# EAGLE board SparkFun_Gyro_Breakout-L3G4200D_Panel_v10 (EAGLE 7.4.0), part 1 of 4
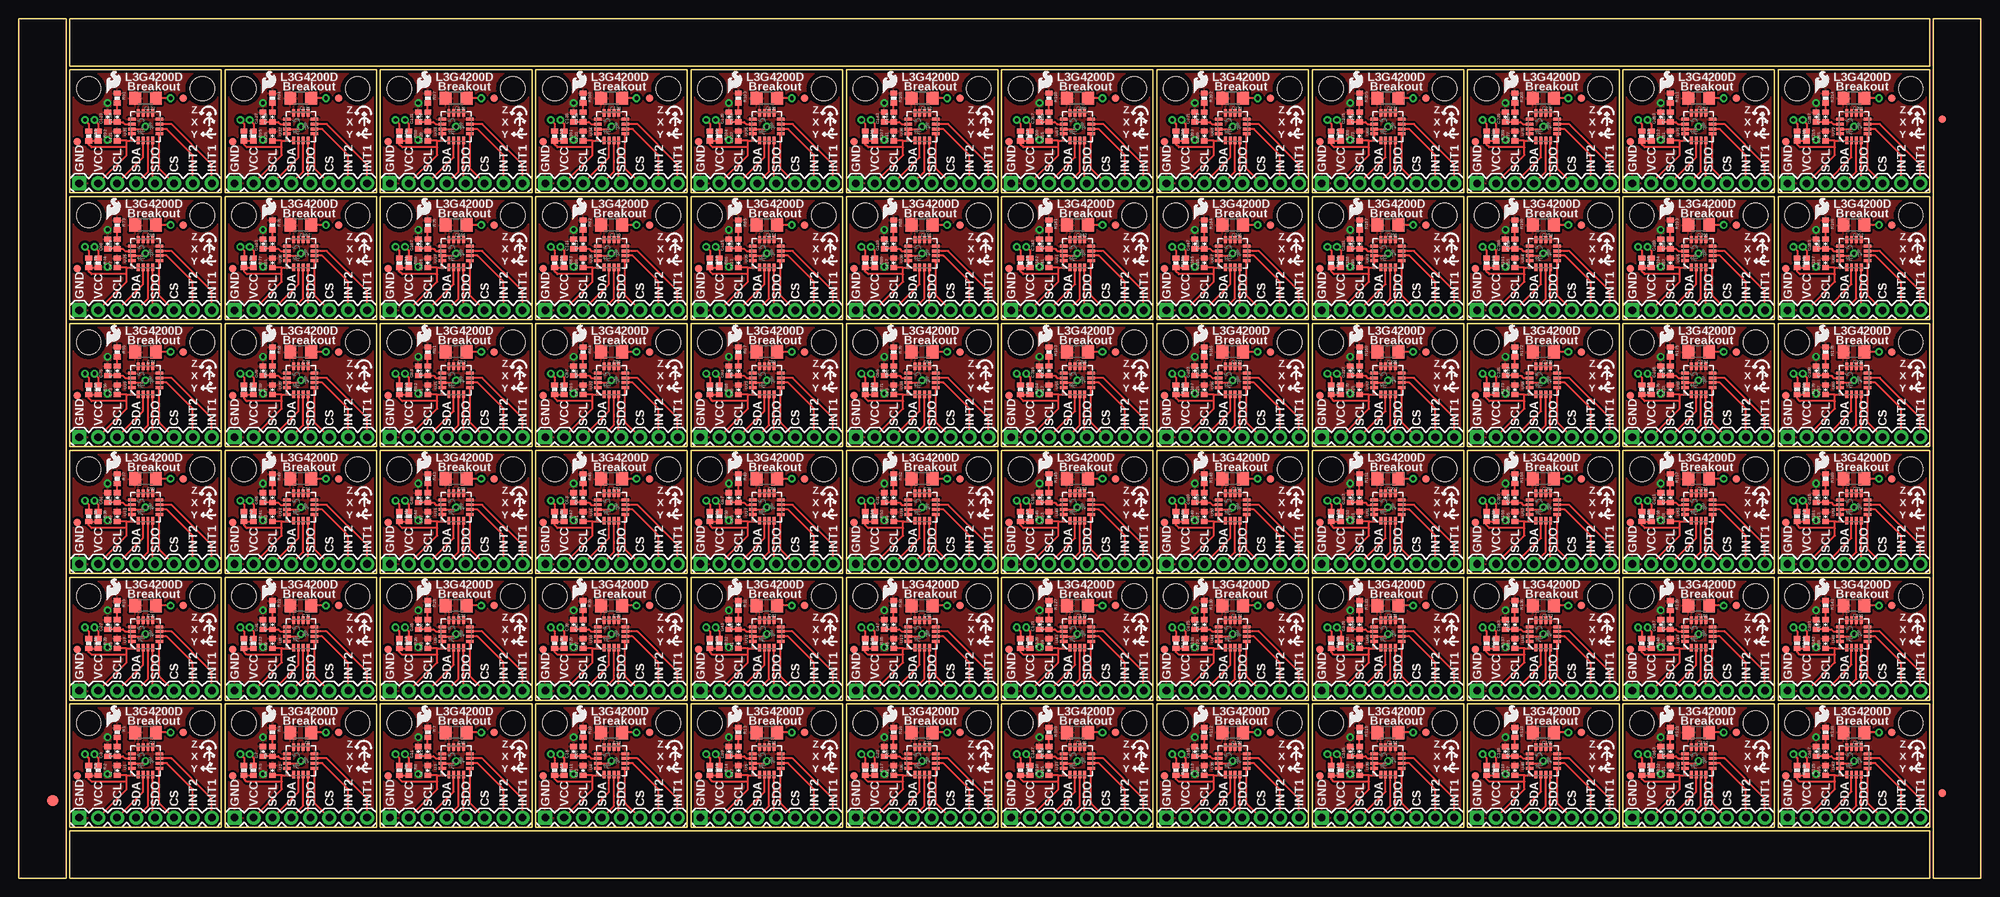
[diagram p0: board, top side]
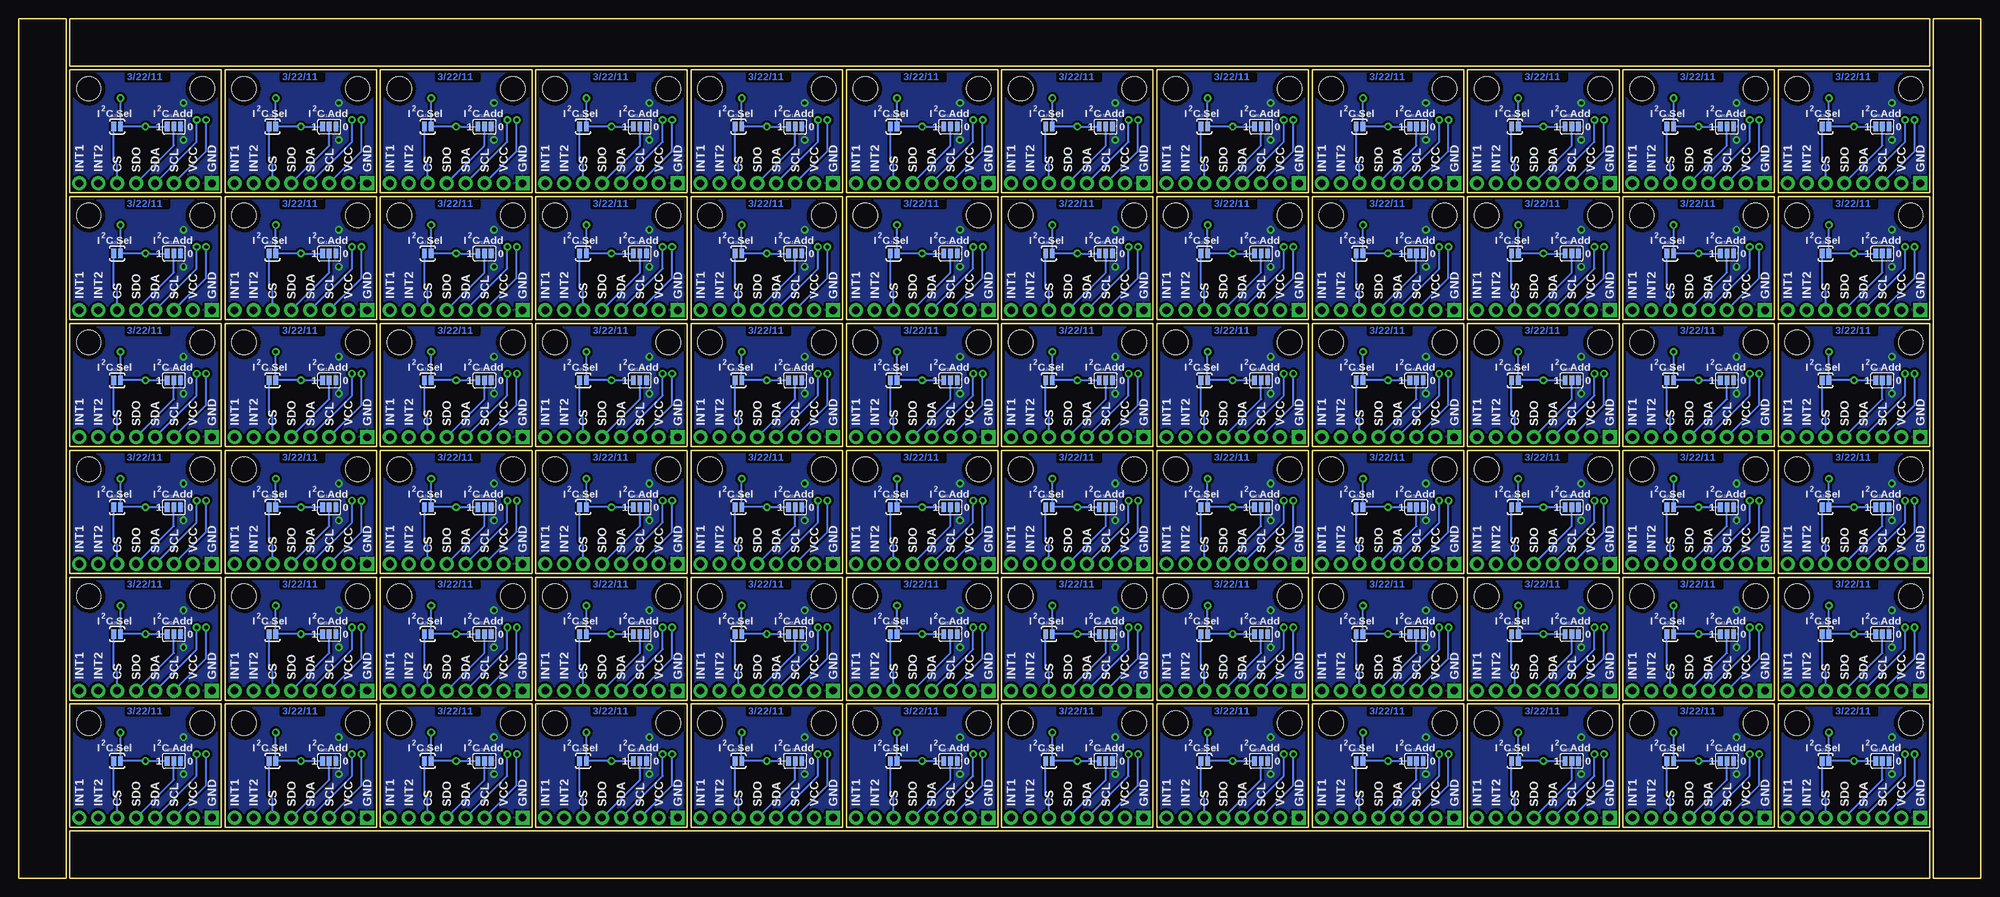
[diagram p1: board, bottom side, seen from below]

Size 263.14 x 115.32 mm. Coordinates in mm from the lower left corner, seen from the top.
Outline: 312 segments
Copper layers (1*16): Top 0.035mm / dielectric 1.5mm / Bottom 0.035mm
Design rules "SparkFun": minimum track width 8mil, minimum drill 20mil, track to track 8mil, track to pad 8mil, pad to pad 8mil, via to via 8mil, smd to smd 8mil, copper to edge 8mil, drill to drill 8mil, minimum pad ring 12mil, minimum via ring 10mil, stop-mask expansion 4mil, vias tented up to drill 20mil, thermal gap 10mil

## Footprints (pad centres in the part's own frame; a part is rotated, then mirrored left to right if it is on the bottom)
0402-CAP = smd 0.7 x 0.9: 1 -0.65,0; 2 0.65,0
1206 = smd 1.6 x 1.8: 1 -1.4,0; 2 1.4,0
FIDUCIAL-1.5X3 = smd 1.5 x 1.5: 1 0,0
FIDUCIAL-1X2 = smd 1 x 1: 1 0,0
1X08 = drill 1.016 pad 1.88 square: 1 0,0 | drill 1.016 pad 1.88: 2 2.54,0; 3 5.08,0; 4 7.62,0; 5 10.16,0; 6 12.7,0; 7 15.24,0; 8 17.78,0
STAND-OFF = hole 3.302: 0,0
0402-RES = smd 0.7 x 0.9: 1 -0.65,0; 2 0.65,0
SJ_3 = smd 0.635 x 1.27: 1 -0.889,0; 2 0,0; 3 0.889,0
SJ_2S-NO = smd 0.635 x 1.27: 1 -0.45,0; 2 0.45,0
LGA16-4X4 = smd 1 x 0.4: 1 -1.85,0.975; 2 -1.85,0.325; 3 -1.85,-0.325; 4 -1.85,-0.975; 9 1.85,-0.975; 10 1.85,-0.325; 11 1.85,0.325; 12 1.85,0.975 | smd 0.4 x 1: 5 -0.975,-1.85; 6 -0.325,-1.85; 7 0.325,-1.85; 8 0.975,-1.85; 13 0.975,1.85; 14 0.325,1.85; 15 -0.325,1.85; 16 -0.975,1.85

## Placement (x,y rotation side)
C1  0.1uF  [0402-CAP]  13.21,14.48 90 top
C2  10uF  [1206]  17.02,19.56 180 top
C3  10nF  [0402-CAP]  11.94,17.02 90 top
C4  470nF  [0402-CAP]  13.21,17.02 90 top
C5  0.1uF  [0402-CAP]  34.04,14.48 90 top
C6  10uF  [1206]  37.85,19.56 180 top
C7  10nF  [0402-CAP]  32.77,17.02 90 top
C8  470nF  [0402-CAP]  34.04,17.02 90 top
C9  0.1uF  [0402-CAP]  54.86,14.48 90 top
C10  10uF  [1206]  58.67,19.56 180 top
C11  10nF  [0402-CAP]  53.59,17.02 90 top
C12  470nF  [0402-CAP]  54.86,17.02 90 top
C13  0.1uF  [0402-CAP]  75.69,14.48 90 top
C14  10uF  [1206]  79.5,19.56 180 top
C15  10nF  [0402-CAP]  74.42,17.02 90 top
C16  470nF  [0402-CAP]  75.69,17.02 90 top
C17  0.1uF  [0402-CAP]  96.52,14.48 90 top
C18  10uF  [1206]  100.33,19.56 180 top
C19  10nF  [0402-CAP]  95.25,17.02 90 top
C20  470nF  [0402-CAP]  96.52,17.02 90 top
C21  0.1uF  [0402-CAP]  117.35,14.48 90 top
C22  10uF  [1206]  121.16,19.56 180 top
C23  10nF  [0402-CAP]  116.08,17.02 90 top
C24  470nF  [0402-CAP]  117.35,17.02 90 top
C25  0.1uF  [0402-CAP]  13.21,31.5 90 top
C26  10uF  [1206]  17.02,36.58 180 top
C27  10nF  [0402-CAP]  11.94,34.04 90 top
C28  470nF  [0402-CAP]  13.21,34.04 90 top
C29  0.1uF  [0402-CAP]  34.04,31.5 90 top
C30  10uF  [1206]  37.85,36.58 180 top
C31  10nF  [0402-CAP]  32.77,34.04 90 top
C32  470nF  [0402-CAP]  34.04,34.04 90 top
C33  0.1uF  [0402-CAP]  54.86,31.5 90 top
C34  10uF  [1206]  58.67,36.58 180 top
C35  10nF  [0402-CAP]  53.59,34.04 90 top
C36  470nF  [0402-CAP]  54.86,34.04 90 top
C37  0.1uF  [0402-CAP]  75.69,31.5 90 top
C38  10uF  [1206]  79.5,36.58 180 top
C39  10nF  [0402-CAP]  74.42,34.04 90 top
C40  470nF  [0402-CAP]  75.69,34.04 90 top
C41  0.1uF  [0402-CAP]  96.52,31.5 90 top
C42  10uF  [1206]  100.33,36.58 180 top
C43  10nF  [0402-CAP]  95.25,34.04 90 top
C44  470nF  [0402-CAP]  96.52,34.04 90 top
C45  0.1uF  [0402-CAP]  117.35,31.5 90 top
C46  10uF  [1206]  121.16,36.58 180 top
C47  10nF  [0402-CAP]  116.08,34.04 90 top
C48  470nF  [0402-CAP]  117.35,34.04 90 top
C49  0.1uF  [0402-CAP]  13.21,48.51 90 top
C50  10uF  [1206]  17.02,53.59 180 top
C51  10nF  [0402-CAP]  11.94,51.05 90 top
C52  470nF  [0402-CAP]  13.21,51.05 90 top
C53  0.1uF  [0402-CAP]  34.04,48.51 90 top
C54  10uF  [1206]  37.85,53.59 180 top
C55  10nF  [0402-CAP]  32.77,51.05 90 top
C56  470nF  [0402-CAP]  34.04,51.05 90 top
C57  0.1uF  [0402-CAP]  54.86,48.51 90 top
C58  10uF  [1206]  58.67,53.59 180 top
C59  10nF  [0402-CAP]  53.59,51.05 90 top
C60  470nF  [0402-CAP]  54.86,51.05 90 top
C61  0.1uF  [0402-CAP]  75.69,48.51 90 top
C62  10uF  [1206]  79.5,53.59 180 top
C63  10nF  [0402-CAP]  74.42,51.05 90 top
C64  470nF  [0402-CAP]  75.69,51.05 90 top
C65  0.1uF  [0402-CAP]  96.52,48.51 90 top
C66  10uF  [1206]  100.33,53.59 180 top
C67  10nF  [0402-CAP]  95.25,51.05 90 top
C68  470nF  [0402-CAP]  96.52,51.05 90 top
C69  0.1uF  [0402-CAP]  117.35,48.51 90 top
C70  10uF  [1206]  121.16,53.59 180 top
C71  10nF  [0402-CAP]  116.08,51.05 90 top
C72  470nF  [0402-CAP]  117.35,51.05 90 top
C73  0.1uF  [0402-CAP]  13.21,65.53 90 top
C74  10uF  [1206]  17.02,70.61 180 top
C75  10nF  [0402-CAP]  11.94,68.07 90 top
C76  470nF  [0402-CAP]  13.21,68.07 90 top
C77  0.1uF  [0402-CAP]  34.04,65.53 90 top
C78  10uF  [1206]  37.85,70.61 180 top
C79  10nF  [0402-CAP]  32.77,68.07 90 top
C80  470nF  [0402-CAP]  34.04,68.07 90 top
C81  0.1uF  [0402-CAP]  54.86,65.53 90 top
C82  10uF  [1206]  58.67,70.61 180 top
C83  10nF  [0402-CAP]  53.59,68.07 90 top
C84  470nF  [0402-CAP]  54.86,68.07 90 top
C85  0.1uF  [0402-CAP]  75.69,65.53 90 top
C86  10uF  [1206]  79.5,70.61 180 top
C87  10nF  [0402-CAP]  74.42,68.07 90 top
C88  470nF  [0402-CAP]  75.69,68.07 90 top
C89  0.1uF  [0402-CAP]  96.52,65.53 90 top
C90  10uF  [1206]  100.33,70.61 180 top
C91  10nF  [0402-CAP]  95.25,68.07 90 top
C92  470nF  [0402-CAP]  96.52,68.07 90 top
C93  0.1uF  [0402-CAP]  117.35,65.53 90 top
C94  10uF  [1206]  121.16,70.61 180 top
C95  10nF  [0402-CAP]  116.08,68.07 90 top
C96  470nF  [0402-CAP]  117.35,68.07 90 top
C97  0.1uF  [0402-CAP]  13.21,82.55 90 top
C98  10uF  [1206]  17.02,87.63 180 top
C99  10nF  [0402-CAP]  11.94,85.09 90 top
C100  470nF  [0402-CAP]  13.21,85.09 90 top
C101  0.1uF  [0402-CAP]  34.04,82.55 90 top
C102  10uF  [1206]  37.85,87.63 180 top
C103  10nF  [0402-CAP]  32.77,85.09 90 top
C104  470nF  [0402-CAP]  34.04,85.09 90 top
C105  0.1uF  [0402-CAP]  54.86,82.55 90 top
C106  10uF  [1206]  58.67,87.63 180 top
C107  10nF  [0402-CAP]  53.59,85.09 90 top
C108  470nF  [0402-CAP]  54.86,85.09 90 top
C109  0.1uF  [0402-CAP]  75.69,82.55 90 top
C110  10uF  [1206]  79.5,87.63 180 top
C111  10nF  [0402-CAP]  74.42,85.09 90 top
C112  470nF  [0402-CAP]  75.69,85.09 90 top
C113  0.1uF  [0402-CAP]  96.52,82.55 90 top
C114  10uF  [1206]  100.33,87.63 180 top
C115  10nF  [0402-CAP]  95.25,85.09 90 top
C116  470nF  [0402-CAP]  96.52,85.09 90 top
C117  0.1uF  [0402-CAP]  117.35,82.55 90 top
C118  10uF  [1206]  121.16,87.63 180 top
C119  10nF  [0402-CAP]  116.08,85.09 90 top
C120  470nF  [0402-CAP]  117.35,85.09 90 top
C121  0.1uF  [0402-CAP]  13.21,99.57 90 top
C122  10uF  [1206]  17.02,104.65 180 top
C123  10nF  [0402-CAP]  11.94,102.11 90 top
C124  470nF  [0402-CAP]  13.21,102.11 90 top
C125  0.1uF  [0402-CAP]  34.04,99.57 90 top
C126  10uF  [1206]  37.85,104.65 180 top
C127  10nF  [0402-CAP]  32.77,102.11 90 top
C128  470nF  [0402-CAP]  34.04,102.11 90 top
C129  0.1uF  [0402-CAP]  54.86,99.57 90 top
C130  10uF  [1206]  58.67,104.65 180 top
C131  10nF  [0402-CAP]  53.59,102.11 90 top
C132  470nF  [0402-CAP]  54.86,102.11 90 top
C133  0.1uF  [0402-CAP]  75.69,99.57 90 top
C134  10uF  [1206]  79.5,104.65 180 top
C135  10nF  [0402-CAP]  74.42,102.11 90 top
C136  470nF  [0402-CAP]  75.69,102.11 90 top
C137  0.1uF  [0402-CAP]  96.52,99.57 90 top
C138  10uF  [1206]  100.33,104.65 180 top
C139  10nF  [0402-CAP]  95.25,102.11 90 top
C140  470nF  [0402-CAP]  96.52,102.11 90 top
C141  0.1uF  [0402-CAP]  117.35,99.57 90 top
C142  10uF  [1206]  121.16,104.65 180 top
C143  10nF  [0402-CAP]  116.08,102.11 90 top
C144  470nF  [0402-CAP]  117.35,102.11 90 top
C145  0.1uF  [0402-CAP]  138.18,14.48 90 top
C146  10uF  [1206]  141.99,19.56 180 top
C147  10nF  [0402-CAP]  136.91,17.02 90 top
C148  470nF  [0402-CAP]  138.18,17.02 90 top
C149  0.1uF  [0402-CAP]  159,14.48 90 top
C150  10uF  [1206]  162.81,19.56 180 top
C151  10nF  [0402-CAP]  157.73,17.02 90 top
C152  470nF  [0402-CAP]  159,17.02 90 top
C153  0.1uF  [0402-CAP]  179.83,14.48 90 top
C154  10uF  [1206]  183.64,19.56 180 top
C155  10nF  [0402-CAP]  178.56,17.02 90 top
C156  470nF  [0402-CAP]  179.83,17.02 90 top
C157  0.1uF  [0402-CAP]  200.66,14.48 90 top
C158  10uF  [1206]  204.47,19.56 180 top
C159  10nF  [0402-CAP]  199.39,17.02 90 top
C160  470nF  [0402-CAP]  200.66,17.02 90 top
C161  0.1uF  [0402-CAP]  221.49,14.48 90 top
C162  10uF  [1206]  225.3,19.56 180 top
C163  10nF  [0402-CAP]  220.22,17.02 90 top
C164  470nF  [0402-CAP]  221.49,17.02 90 top
C165  0.1uF  [0402-CAP]  242.32,14.48 90 top
C166  10uF  [1206]  246.13,19.56 180 top
C167  10nF  [0402-CAP]  241.05,17.02 90 top
C168  470nF  [0402-CAP]  242.32,17.02 90 top
C169  0.1uF  [0402-CAP]  138.18,31.5 90 top
C170  10uF  [1206]  141.99,36.58 180 top
C171  10nF  [0402-CAP]  136.91,34.04 90 top
C172  470nF  [0402-CAP]  138.18,34.04 90 top
C173  0.1uF  [0402-CAP]  159,31.5 90 top
C174  10uF  [1206]  162.81,36.58 180 top
C175  10nF  [0402-CAP]  157.73,34.04 90 top
C176  470nF  [0402-CAP]  159,34.04 90 top
C177  0.1uF  [0402-CAP]  179.83,31.5 90 top
C178  10uF  [1206]  183.64,36.58 180 top
C179  10nF  [0402-CAP]  178.56,34.04 90 top
C180  470nF  [0402-CAP]  179.83,34.04 90 top
C181  0.1uF  [0402-CAP]  200.66,31.5 90 top
C182  10uF  [1206]  204.47,36.58 180 top
C183  10nF  [0402-CAP]  199.39,34.04 90 top
C184  470nF  [0402-CAP]  200.66,34.04 90 top
C185  0.1uF  [0402-CAP]  221.49,31.5 90 top
C186  10uF  [1206]  225.3,36.58 180 top
C187  10nF  [0402-CAP]  220.22,34.04 90 top
C188  470nF  [0402-CAP]  221.49,34.04 90 top
C189  0.1uF  [0402-CAP]  242.32,31.5 90 top
C190  10uF  [1206]  246.13,36.58 180 top
C191  10nF  [0402-CAP]  241.05,34.04 90 top
C192  470nF  [0402-CAP]  242.32,34.04 90 top
C193  0.1uF  [0402-CAP]  138.18,48.51 90 top
C194  10uF  [1206]  141.99,53.59 180 top
C195  10nF  [0402-CAP]  136.91,51.05 90 top
C196  470nF  [0402-CAP]  138.18,51.05 90 top
C197  0.1uF  [0402-CAP]  159,48.51 90 top
C198  10uF  [1206]  162.81,53.59 180 top
C199  10nF  [0402-CAP]  157.73,51.05 90 top
C200  470nF  [0402-CAP]  159,51.05 90 top
C201  0.1uF  [0402-CAP]  179.83,48.51 90 top
C202  10uF  [1206]  183.64,53.59 180 top
C203  10nF  [0402-CAP]  178.56,51.05 90 top
C204  470nF  [0402-CAP]  179.83,51.05 90 top
C205  0.1uF  [0402-CAP]  200.66,48.51 90 top
C206  10uF  [1206]  204.47,53.59 180 top
C207  10nF  [0402-CAP]  199.39,51.05 90 top
C208  470nF  [0402-CAP]  200.66,51.05 90 top
C209  0.1uF  [0402-CAP]  221.49,48.51 90 top
C210  10uF  [1206]  225.3,53.59 180 top
C211  10nF  [0402-CAP]  220.22,51.05 90 top
C212  470nF  [0402-CAP]  221.49,51.05 90 top
C213  0.1uF  [0402-CAP]  242.32,48.51 90 top
C214  10uF  [1206]  246.13,53.59 180 top
C215  10nF  [0402-CAP]  241.05,51.05 90 top
C216  470nF  [0402-CAP]  242.32,51.05 90 top
C217  0.1uF  [0402-CAP]  138.18,65.53 90 top
C218  10uF  [1206]  141.99,70.61 180 top
C219  10nF  [0402-CAP]  136.91,68.07 90 top
C220  470nF  [0402-CAP]  138.18,68.07 90 top
C221  0.1uF  [0402-CAP]  159,65.53 90 top
C222  10uF  [1206]  162.81,70.61 180 top
C223  10nF  [0402-CAP]  157.73,68.07 90 top
C224  470nF  [0402-CAP]  159,68.07 90 top
C225  0.1uF  [0402-CAP]  179.83,65.53 90 top
C226  10uF  [1206]  183.64,70.61 180 top
C227  10nF  [0402-CAP]  178.56,68.07 90 top
C228  470nF  [0402-CAP]  179.83,68.07 90 top
C229  0.1uF  [0402-CAP]  200.66,65.53 90 top
C230  10uF  [1206]  204.47,70.61 180 top
C231  10nF  [0402-CAP]  199.39,68.07 90 top
C232  470nF  [0402-CAP]  200.66,68.07 90 top
C233  0.1uF  [0402-CAP]  221.49,65.53 90 top
C234  10uF  [1206]  225.3,70.61 180 top
C235  10nF  [0402-CAP]  220.22,68.07 90 top
C236  470nF  [0402-CAP]  221.49,68.07 90 top
C237  0.1uF  [0402-CAP]  242.32,65.53 90 top
C238  10uF  [1206]  246.13,70.61 180 top
C239  10nF  [0402-CAP]  241.05,68.07 90 top
C240  470nF  [0402-CAP]  242.32,68.07 90 top
C241  0.1uF  [0402-CAP]  138.18,82.55 90 top
C242  10uF  [1206]  141.99,87.63 180 top
C243  10nF  [0402-CAP]  136.91,85.09 90 top
C244  470nF  [0402-CAP]  138.18,85.09 90 top
C245  0.1uF  [0402-CAP]  159,82.55 90 top
C246  10uF  [1206]  162.81,87.63 180 top
C247  10nF  [0402-CAP]  157.73,85.09 90 top
C248  470nF  [0402-CAP]  159,85.09 90 top
C249  0.1uF  [0402-CAP]  179.83,82.55 90 top
C250  10uF  [1206]  183.64,87.63 180 top
C251  10nF  [0402-CAP]  178.56,85.09 90 top
C252  470nF  [0402-CAP]  179.83,85.09 90 top
C253  0.1uF  [0402-CAP]  200.66,82.55 90 top
C254  10uF  [1206]  204.47,87.63 180 top
C255  10nF  [0402-CAP]  199.39,85.09 90 top
C256  470nF  [0402-CAP]  200.66,85.09 90 top
C257  0.1uF  [0402-CAP]  221.49,82.55 90 top
C258  10uF  [1206]  225.3,87.63 180 top
C259  10nF  [0402-CAP]  220.22,85.09 90 top
C260  470nF  [0402-CAP]  221.49,85.09 90 top
C261  0.1uF  [0402-CAP]  242.32,82.55 90 top
C262  10uF  [1206]  246.13,87.63 180 top
C263  10nF  [0402-CAP]  241.05,85.09 90 top
C264  470nF  [0402-CAP]  242.32,85.09 90 top
C265  0.1uF  [0402-CAP]  138.18,99.57 90 top
C266  10uF  [1206]  141.99,104.65 180 top
C267  10nF  [0402-CAP]  136.91,102.11 90 top
C268  470nF  [0402-CAP]  138.18,102.11 90 top
C269  0.1uF  [0402-CAP]  159,99.57 90 top
C270  10uF  [1206]  162.81,104.65 180 top
C271  10nF  [0402-CAP]  157.73,102.11 90 top
C272  470nF  [0402-CAP]  159,102.11 90 top
C273  0.1uF  [0402-CAP]  179.83,99.57 90 top
C274  10uF  [1206]  183.64,104.65 180 top
C275  10nF  [0402-CAP]  178.56,102.11 90 top
C276  470nF  [0402-CAP]  179.83,102.11 90 top
C277  0.1uF  [0402-CAP]  200.66,99.57 90 top
C278  10uF  [1206]  204.47,104.65 180 top
C279  10nF  [0402-CAP]  199.39,102.11 90 top
C280  470nF  [0402-CAP]  200.66,102.11 90 top
C281  0.1uF  [0402-CAP]  221.49,99.57 90 top
C282  10uF  [1206]  225.3,104.65 180 top
C283  10nF  [0402-CAP]  220.22,102.11 90 top
C284  470nF  [0402-CAP]  221.49,102.11 90 top
C285  0.1uF  [0402-CAP]  242.32,99.57 90 top
C286  10uF  [1206]  246.13,104.65 180 top
C287  10nF  [0402-CAP]  241.05,102.11 90 top
C288  470nF  [0402-CAP]  242.32,102.11 90 top
E$1  [FIDUCIAL-1.5X3]  4.57,10.41 0 top
E$5  [FIDUCIAL-1X2]  257.94,11.43 0 top
E$6  [FIDUCIAL-1X2]  257.94,101.85 180 top
JP1  OUTPUT  [1X08]  8.13,8.13 0 top
JP2  STAND-OFF  [STAND-OFF]  9.4,20.83 0 top
JP3  STAND-OFF  [STAND-OFF]  24.64,20.83 0 top
JP4  LOGO-SFESK  [SFE-LOGO-FLAME]  11.81,20.32 0 top
JP5  FIDUCIAL1X2  [FIDUCIAL-1X2]  7.87,13.72 0 top
JP6  FIDUCIAL1X2  [FIDUCIAL-1X2]  22.1,19.56 0 top
JP7  OUTPUT  [1X08]  28.96,8.13 0 top
JP8  STAND-OFF  [STAND-OFF]  30.23,20.83 0 top
JP9  STAND-OFF  [STAND-OFF]  45.47,20.83 0 top
JP10  LOGO-SFESK  [SFE-LOGO-FLAME]  32.64,20.32 0 top
JP11  FIDUCIAL1X2  [FIDUCIAL-1X2]  28.7,13.72 0 top
JP12  FIDUCIAL1X2  [FIDUCIAL-1X2]  42.93,19.56 0 top
JP13  OUTPUT  [1X08]  49.78,8.13 0 top
JP14  STAND-OFF  [STAND-OFF]  51.05,20.83 0 top
JP15  STAND-OFF  [STAND-OFF]  66.29,20.83 0 top
JP16  LOGO-SFESK  [SFE-LOGO-FLAME]  53.47,20.32 0 top
JP17  FIDUCIAL1X2  [FIDUCIAL-1X2]  49.53,13.72 0 top
JP18  FIDUCIAL1X2  [FIDUCIAL-1X2]  63.75,19.56 0 top
JP19  OUTPUT  [1X08]  70.61,8.13 0 top
JP20  STAND-OFF  [STAND-OFF]  71.88,20.83 0 top
JP21  STAND-OFF  [STAND-OFF]  87.12,20.83 0 top
JP22  LOGO-SFESK  [SFE-LOGO-FLAME]  74.3,20.32 0 top
JP23  FIDUCIAL1X2  [FIDUCIAL-1X2]  70.36,13.72 0 top
JP24  FIDUCIAL1X2  [FIDUCIAL-1X2]  84.58,19.56 0 top
JP25  OUTPUT  [1X08]  91.44,8.13 0 top
JP26  STAND-OFF  [STAND-OFF]  92.71,20.83 0 top
JP27  STAND-OFF  [STAND-OFF]  107.95,20.83 0 top
JP28  LOGO-SFESK  [SFE-LOGO-FLAME]  95.12,20.32 0 top
JP29  FIDUCIAL1X2  [FIDUCIAL-1X2]  91.19,13.72 0 top
JP30  FIDUCIAL1X2  [FIDUCIAL-1X2]  105.41,19.56 0 top
JP31  OUTPUT  [1X08]  112.27,8.13 0 top
JP32  STAND-OFF  [STAND-OFF]  113.54,20.83 0 top
JP33  STAND-OFF  [STAND-OFF]  128.78,20.83 0 top
JP34  LOGO-SFESK  [SFE-LOGO-FLAME]  115.95,20.32 0 top
JP35  FIDUCIAL1X2  [FIDUCIAL-1X2]  112.01,13.72 0 top
JP36  FIDUCIAL1X2  [FIDUCIAL-1X2]  126.24,19.56 0 top
JP37  OUTPUT  [1X08]  8.13,25.15 0 top
JP38  STAND-OFF  [STAND-OFF]  9.4,37.85 0 top
JP39  STAND-OFF  [STAND-OFF]  24.64,37.85 0 top
JP40  LOGO-SFESK  [SFE-LOGO-FLAME]  11.81,37.34 0 top
JP41  FIDUCIAL1X2  [FIDUCIAL-1X2]  7.87,30.73 0 top
JP42  FIDUCIAL1X2  [FIDUCIAL-1X2]  22.1,36.58 0 top
JP43  OUTPUT  [1X08]  28.96,25.15 0 top
JP44  STAND-OFF  [STAND-OFF]  30.23,37.85 0 top
JP45  STAND-OFF  [STAND-OFF]  45.47,37.85 0 top
JP46  LOGO-SFESK  [SFE-LOGO-FLAME]  32.64,37.34 0 top
JP47  FIDUCIAL1X2  [FIDUCIAL-1X2]  28.7,30.73 0 top
JP48  FIDUCIAL1X2  [FIDUCIAL-1X2]  42.93,36.58 0 top
JP49  OUTPUT  [1X08]  49.78,25.15 0 top
JP50  STAND-OFF  [STAND-OFF]  51.05,37.85 0 top
JP51  STAND-OFF  [STAND-OFF]  66.29,37.85 0 top
JP52  LOGO-SFESK  [SFE-LOGO-FLAME]  53.47,37.34 0 top
JP53  FIDUCIAL1X2  [FIDUCIAL-1X2]  49.53,30.73 0 top
JP54  FIDUCIAL1X2  [FIDUCIAL-1X2]  63.75,36.58 0 top
JP55  OUTPUT  [1X08]  70.61,25.15 0 top
JP56  STAND-OFF  [STAND-OFF]  71.88,37.85 0 top
JP57  STAND-OFF  [STAND-OFF]  87.12,37.85 0 top
JP58  LOGO-SFESK  [SFE-LOGO-FLAME]  74.3,37.34 0 top
JP59  FIDUCIAL1X2  [FIDUCIAL-1X2]  70.36,30.73 0 top
JP60  FIDUCIAL1X2  [FIDUCIAL-1X2]  84.58,36.58 0 top
JP61  OUTPUT  [1X08]  91.44,25.15 0 top
JP62  STAND-OFF  [STAND-OFF]  92.71,37.85 0 top
JP63  STAND-OFF  [STAND-OFF]  107.95,37.85 0 top
JP64  LOGO-SFESK  [SFE-LOGO-FLAME]  95.12,37.34 0 top
JP65  FIDUCIAL1X2  [FIDUCIAL-1X2]  91.19,30.73 0 top
JP66  FIDUCIAL1X2  [FIDUCIAL-1X2]  105.41,36.58 0 top
JP67  OUTPUT  [1X08]  112.27,25.15 0 top
JP68  STAND-OFF  [STAND-OFF]  113.54,37.85 0 top
JP69  STAND-OFF  [STAND-OFF]  128.78,37.85 0 top
JP70  LOGO-SFESK  [SFE-LOGO-FLAME]  115.95,37.34 0 top
JP71  FIDUCIAL1X2  [FIDUCIAL-1X2]  112.01,30.73 0 top
JP72  FIDUCIAL1X2  [FIDUCIAL-1X2]  126.24,36.58 0 top
JP73  OUTPUT  [1X08]  8.13,42.16 0 top
JP74  STAND-OFF  [STAND-OFF]  9.4,54.86 0 top
JP75  STAND-OFF  [STAND-OFF]  24.64,54.86 0 top
JP76  LOGO-SFESK  [SFE-LOGO-FLAME]  11.81,54.36 0 top
JP77  FIDUCIAL1X2  [FIDUCIAL-1X2]  7.87,47.75 0 top
JP78  FIDUCIAL1X2  [FIDUCIAL-1X2]  22.1,53.59 0 top
JP79  OUTPUT  [1X08]  28.96,42.16 0 top
JP80  STAND-OFF  [STAND-OFF]  30.23,54.86 0 top
JP81  STAND-OFF  [STAND-OFF]  45.47,54.86 0 top
JP82  LOGO-SFESK  [SFE-LOGO-FLAME]  32.64,54.36 0 top
JP83  FIDUCIAL1X2  [FIDUCIAL-1X2]  28.7,47.75 0 top
JP84  FIDUCIAL1X2  [FIDUCIAL-1X2]  42.93,53.59 0 top
JP85  OUTPUT  [1X08]  49.78,42.16 0 top
JP86  STAND-OFF  [STAND-OFF]  51.05,54.86 0 top
JP87  STAND-OFF  [STAND-OFF]  66.29,54.86 0 top
JP88  LOGO-SFESK  [SFE-LOGO-FLAME]  53.47,54.36 0 top
JP89  FIDUCIAL1X2  [FIDUCIAL-1X2]  49.53,47.75 0 top
JP90  FIDUCIAL1X2  [FIDUCIAL-1X2]  63.75,53.59 0 top
JP91  OUTPUT  [1X08]  70.61,42.16 0 top
JP92  STAND-OFF  [STAND-OFF]  71.88,54.86 0 top
JP93  STAND-OFF  [STAND-OFF]  87.12,54.86 0 top
JP94  LOGO-SFESK  [SFE-LOGO-FLAME]  74.3,54.36 0 top
JP95  FIDUCIAL1X2  [FIDUCIAL-1X2]  70.36,47.75 0 top
JP96  FIDUCIAL1X2  [FIDUCIAL-1X2]  84.58,53.59 0 top
JP97  OUTPUT  [1X08]  91.44,42.16 0 top
JP98  STAND-OFF  [STAND-OFF]  92.71,54.86 0 top
JP99  STAND-OFF  [STAND-OFF]  107.95,54.86 0 top
JP100  LOGO-SFESK  [SFE-LOGO-FLAME]  95.12,54.36 0 top
JP101  FIDUCIAL1X2  [FIDUCIAL-1X2]  91.19,47.75 0 top
JP102  FIDUCIAL1X2  [FIDUCIAL-1X2]  105.41,53.59 0 top
JP103  OUTPUT  [1X08]  112.27,42.16 0 top
JP104  STAND-OFF  [STAND-OFF]  113.54,54.86 0 top
JP105  STAND-OFF  [STAND-OFF]  128.78,54.86 0 top
JP106  LOGO-SFESK  [SFE-LOGO-FLAME]  115.95,54.36 0 top
JP107  FIDUCIAL1X2  [FIDUCIAL-1X2]  112.01,47.75 0 top
JP108  FIDUCIAL1X2  [FIDUCIAL-1X2]  126.24,53.59 0 top
JP109  OUTPUT  [1X08]  8.13,59.18 0 top
JP110  STAND-OFF  [STAND-OFF]  9.4,71.88 0 top
JP111  STAND-OFF  [STAND-OFF]  24.64,71.88 0 top
JP112  LOGO-SFESK  [SFE-LOGO-FLAME]  11.81,71.37 0 top
JP113  FIDUCIAL1X2  [FIDUCIAL-1X2]  7.87,64.77 0 top
JP114  FIDUCIAL1X2  [FIDUCIAL-1X2]  22.1,70.61 0 top
JP115  OUTPUT  [1X08]  28.96,59.18 0 top
JP116  STAND-OFF  [STAND-OFF]  30.23,71.88 0 top
JP117  STAND-OFF  [STAND-OFF]  45.47,71.88 0 top
JP118  LOGO-SFESK  [SFE-LOGO-FLAME]  32.64,71.37 0 top
JP119  FIDUCIAL1X2  [FIDUCIAL-1X2]  28.7,64.77 0 top
JP120  FIDUCIAL1X2  [FIDUCIAL-1X2]  42.93,70.61 0 top
JP121  OUTPUT  [1X08]  49.78,59.18 0 top
JP122  STAND-OFF  [STAND-OFF]  51.05,71.88 0 top
JP123  STAND-OFF  [STAND-OFF]  66.29,71.88 0 top
JP124  LOGO-SFESK  [SFE-LOGO-FLAME]  53.47,71.37 0 top
JP125  FIDUCIAL1X2  [FIDUCIAL-1X2]  49.53,64.77 0 top
JP126  FIDUCIAL1X2  [FIDUCIAL-1X2]  63.75,70.61 0 top
JP127  OUTPUT  [1X08]  70.61,59.18 0 top
JP128  STAND-OFF  [STAND-OFF]  71.88,71.88 0 top
JP129  STAND-OFF  [STAND-OFF]  87.12,71.88 0 top
JP130  LOGO-SFESK  [SFE-LOGO-FLAME]  74.3,71.37 0 top
JP131  FIDUCIAL1X2  [FIDUCIAL-1X2]  70.36,64.77 0 top
JP132  FIDUCIAL1X2  [FIDUCIAL-1X2]  84.58,70.61 0 top
JP133  OUTPUT  [1X08]  91.44,59.18 0 top
JP134  STAND-OFF  [STAND-OFF]  92.71,71.88 0 top
JP135  STAND-OFF  [STAND-OFF]  107.95,71.88 0 top
JP136  LOGO-SFESK  [SFE-LOGO-FLAME]  95.12,71.37 0 top
JP137  FIDUCIAL1X2  [FIDUCIAL-1X2]  91.19,64.77 0 top
JP138  FIDUCIAL1X2  [FIDUCIAL-1X2]  105.41,70.61 0 top
JP139  OUTPUT  [1X08]  112.27,59.18 0 top
JP140  STAND-OFF  [STAND-OFF]  113.54,71.88 0 top
JP141  STAND-OFF  [STAND-OFF]  128.78,71.88 0 top
JP142  LOGO-SFESK  [SFE-LOGO-FLAME]  115.95,71.37 0 top
JP143  FIDUCIAL1X2  [FIDUCIAL-1X2]  112.01,64.77 0 top
JP144  FIDUCIAL1X2  [FIDUCIAL-1X2]  126.24,70.61 0 top
JP145  OUTPUT  [1X08]  8.13,76.2 0 top
JP146  STAND-OFF  [STAND-OFF]  9.4,88.9 0 top
JP147  STAND-OFF  [STAND-OFF]  24.64,88.9 0 top
JP148  LOGO-SFESK  [SFE-LOGO-FLAME]  11.81,88.39 0 top
JP149  FIDUCIAL1X2  [FIDUCIAL-1X2]  7.87,81.79 0 top
JP150  FIDUCIAL1X2  [FIDUCIAL-1X2]  22.1,87.63 0 top
JP151  OUTPUT  [1X08]  28.96,76.2 0 top
JP152  STAND-OFF  [STAND-OFF]  30.23,88.9 0 top
JP153  STAND-OFF  [STAND-OFF]  45.47,88.9 0 top
JP154  LOGO-SFESK  [SFE-LOGO-FLAME]  32.64,88.39 0 top
JP155  FIDUCIAL1X2  [FIDUCIAL-1X2]  28.7,81.79 0 top
JP156  FIDUCIAL1X2  [FIDUCIAL-1X2]  42.93,87.63 0 top
JP157  OUTPUT  [1X08]  49.78,76.2 0 top
JP158  STAND-OFF  [STAND-OFF]  51.05,88.9 0 top
JP159  STAND-OFF  [STAND-OFF]  66.29,88.9 0 top
JP160  LOGO-SFESK  [SFE-LOGO-FLAME]  53.47,88.39 0 top
JP161  FIDUCIAL1X2  [FIDUCIAL-1X2]  49.53,81.79 0 top
JP162  FIDUCIAL1X2  [FIDUCIAL-1X2]  63.75,87.63 0 top
JP163  OUTPUT  [1X08]  70.61,76.2 0 top
JP164  STAND-OFF  [STAND-OFF]  71.88,88.9 0 top
JP165  STAND-OFF  [STAND-OFF]  87.12,88.9 0 top
JP166  LOGO-SFESK  [SFE-LOGO-FLAME]  74.3,88.39 0 top
JP167  FIDUCIAL1X2  [FIDUCIAL-1X2]  70.36,81.79 0 top
JP168  FIDUCIAL1X2  [FIDUCIAL-1X2]  84.58,87.63 0 top
JP169  OUTPUT  [1X08]  91.44,76.2 0 top
JP170  STAND-OFF  [STAND-OFF]  92.71,88.9 0 top
JP171  STAND-OFF  [STAND-OFF]  107.95,88.9 0 top
JP172  LOGO-SFESK  [SFE-LOGO-FLAME]  95.12,88.39 0 top
JP173  FIDUCIAL1X2  [FIDUCIAL-1X2]  91.19,81.79 0 top
JP174  FIDUCIAL1X2  [FIDUCIAL-1X2]  105.41,87.63 0 top
JP175  OUTPUT  [1X08]  112.27,76.2 0 top
JP176  STAND-OFF  [STAND-OFF]  113.54,88.9 0 top
JP177  STAND-OFF  [STAND-OFF]  128.78,88.9 0 top
JP178  LOGO-SFESK  [SFE-LOGO-FLAME]  115.95,88.39 0 top
JP179  FIDUCIAL1X2  [FIDUCIAL-1X2]  112.01,81.79 0 top
JP180  FIDUCIAL1X2  [FIDUCIAL-1X2]  126.24,87.63 0 top
JP181  OUTPUT  [1X08]  8.13,93.22 0 top
JP182  STAND-OFF  [STAND-OFF]  9.4,105.92 0 top
JP183  STAND-OFF  [STAND-OFF]  24.64,105.92 0 top
JP184  LOGO-SFESK  [SFE-LOGO-FLAME]  11.81,105.41 0 top
JP185  FIDUCIAL1X2  [FIDUCIAL-1X2]  7.87,98.81 0 top
JP186  FIDUCIAL1X2  [FIDUCIAL-1X2]  22.1,104.65 0 top
JP187  OUTPUT  [1X08]  28.96,93.22 0 top
JP188  STAND-OFF  [STAND-OFF]  30.23,105.92 0 top
JP189  STAND-OFF  [STAND-OFF]  45.47,105.92 0 top
JP190  LOGO-SFESK  [SFE-LOGO-FLAME]  32.64,105.41 0 top
JP191  FIDUCIAL1X2  [FIDUCIAL-1X2]  28.7,98.81 0 top
JP192  FIDUCIAL1X2  [FIDUCIAL-1X2]  42.93,104.65 0 top
JP193  OUTPUT  [1X08]  49.78,93.22 0 top
JP194  STAND-OFF  [STAND-OFF]  51.05,105.92 0 top
JP195  STAND-OFF  [STAND-OFF]  66.29,105.92 0 top
JP196  LOGO-SFESK  [SFE-LOGO-FLAME]  53.47,105.41 0 top
JP197  FIDUCIAL1X2  [FIDUCIAL-1X2]  49.53,98.81 0 top
JP198  FIDUCIAL1X2  [FIDUCIAL-1X2]  63.75,104.65 0 top
JP199  OUTPUT  [1X08]  70.61,93.22 0 top
JP200  STAND-OFF  [STAND-OFF]  71.88,105.92 0 top
JP201  STAND-OFF  [STAND-OFF]  87.12,105.92 0 top
JP202  LOGO-SFESK  [SFE-LOGO-FLAME]  74.3,105.41 0 top
JP203  FIDUCIAL1X2  [FIDUCIAL-1X2]  70.36,98.81 0 top
JP204  FIDUCIAL1X2  [FIDUCIAL-1X2]  84.58,104.65 0 top
JP205  OUTPUT  [1X08]  91.44,93.22 0 top
JP206  STAND-OFF  [STAND-OFF]  92.71,105.92 0 top
JP207  STAND-OFF  [STAND-OFF]  107.95,105.92 0 top
JP208  LOGO-SFESK  [SFE-LOGO-FLAME]  95.12,105.41 0 top
JP209  FIDUCIAL1X2  [FIDUCIAL-1X2]  91.19,98.81 0 top
JP210  FIDUCIAL1X2  [FIDUCIAL-1X2]  105.41,104.65 0 top
JP211  OUTPUT  [1X08]  112.27,93.22 0 top
JP212  STAND-OFF  [STAND-OFF]  113.54,105.92 0 top
JP213  STAND-OFF  [STAND-OFF]  128.78,105.92 0 top
JP214  LOGO-SFESK  [SFE-LOGO-FLAME]  115.95,105.41 0 top
JP215  FIDUCIAL1X2  [FIDUCIAL-1X2]  112.01,98.81 0 top
JP216  FIDUCIAL1X2  [FIDUCIAL-1X2]  126.24,104.65 0 top
JP217  OUTPUT  [1X08]  133.1,8.13 0 top
JP218  STAND-OFF  [STAND-OFF]  134.37,20.83 0 top
JP219  STAND-OFF  [STAND-OFF]  149.61,20.83 0 top
JP220  LOGO-SFESK  [SFE-LOGO-FLAME]  136.78,20.32 0 top
JP221  FIDUCIAL1X2  [FIDUCIAL-1X2]  132.84,13.72 0 top
JP222  FIDUCIAL1X2  [FIDUCIAL-1X2]  147.07,19.56 0 top
JP223  OUTPUT  [1X08]  153.92,8.13 0 top
JP224  STAND-OFF  [STAND-OFF]  155.19,20.83 0 top
JP225  STAND-OFF  [STAND-OFF]  170.43,20.83 0 top
JP226  LOGO-SFESK  [SFE-LOGO-FLAME]  157.61,20.32 0 top
JP227  FIDUCIAL1X2  [FIDUCIAL-1X2]  153.67,13.72 0 top
JP228  FIDUCIAL1X2  [FIDUCIAL-1X2]  167.89,19.56 0 top
JP229  OUTPUT  [1X08]  174.75,8.13 0 top
JP230  STAND-OFF  [STAND-OFF]  176.02,20.83 0 top
JP231  STAND-OFF  [STAND-OFF]  191.26,20.83 0 top
JP232  LOGO-SFESK  [SFE-LOGO-FLAME]  178.44,20.32 0 top
JP233  FIDUCIAL1X2  [FIDUCIAL-1X2]  174.5,13.72 0 top
JP234  FIDUCIAL1X2  [FIDUCIAL-1X2]  188.72,19.56 0 top
JP235  OUTPUT  [1X08]  195.58,8.13 0 top
JP236  STAND-OFF  [STAND-OFF]  196.85,20.83 0 top
JP237  STAND-OFF  [STAND-OFF]  212.09,20.83 0 top
JP238  LOGO-SFESK  [SFE-LOGO-FLAME]  199.26,20.32 0 top
JP239  FIDUCIAL1X2  [FIDUCIAL-1X2]  195.33,13.72 0 top
JP240  FIDUCIAL1X2  [FIDUCIAL-1X2]  209.55,19.56 0 top
JP241  OUTPUT  [1X08]  216.41,8.13 0 top
JP242  STAND-OFF  [STAND-OFF]  217.68,20.83 0 top
JP243  STAND-OFF  [STAND-OFF]  232.92,20.83 0 top
JP244  LOGO-SFESK  [SFE-LOGO-FLAME]  220.09,20.32 0 top
JP245  FIDUCIAL1X2  [FIDUCIAL-1X2]  216.15,13.72 0 top
JP246  FIDUCIAL1X2  [FIDUCIAL-1X2]  230.38,19.56 0 top
JP247  OUTPUT  [1X08]  237.24,8.13 0 top
JP248  STAND-OFF  [STAND-OFF]  238.51,20.83 0 top
JP249  STAND-OFF  [STAND-OFF]  253.75,20.83 0 top
JP250  LOGO-SFESK  [SFE-LOGO-FLAME]  240.92,20.32 0 top
JP251  FIDUCIAL1X2  [FIDUCIAL-1X2]  236.98,13.72 0 top
JP252  FIDUCIAL1X2  [FIDUCIAL-1X2]  251.21,19.56 0 top
JP253  OUTPUT  [1X08]  133.1,25.15 0 top
JP254  STAND-OFF  [STAND-OFF]  134.37,37.85 0 top
JP255  STAND-OFF  [STAND-OFF]  149.61,37.85 0 top
JP256  LOGO-SFESK  [SFE-LOGO-FLAME]  136.78,37.34 0 top
JP257  FIDUCIAL1X2  [FIDUCIAL-1X2]  132.84,30.73 0 top
JP258  FIDUCIAL1X2  [FIDUCIAL-1X2]  147.07,36.58 0 top
JP259  OUTPUT  [1X08]  153.92,25.15 0 top
JP260  STAND-OFF  [STAND-OFF]  155.19,37.85 0 top
JP261  STAND-OFF  [STAND-OFF]  170.43,37.85 0 top
JP262  LOGO-SFESK  [SFE-LOGO-FLAME]  157.61,37.34 0 top
JP263  FIDUCIAL1X2  [FIDUCIAL-1X2]  153.67,30.73 0 top
JP264  FIDUCIAL1X2  [FIDUCIAL-1X2]  167.89,36.58 0 top
JP265  OUTPUT  [1X08]  174.75,25.15 0 top
JP266  STAND-OFF  [STAND-OFF]  176.02,37.85 0 top
JP267  STAND-OFF  [STAND-OFF]  191.26,37.85 0 top
JP268  LOGO-SFESK  [SFE-LOGO-FLAME]  178.44,37.34 0 top
JP269  FIDUCIAL1X2  [FIDUCIAL-1X2]  174.5,30.73 0 top
JP270  FIDUCIAL1X2  [FIDUCIAL-1X2]  188.72,36.58 0 top
JP271  OUTPUT  [1X08]  195.58,25.15 0 top
JP272  STAND-OFF  [STAND-OFF]  196.85,37.85 0 top
JP273  STAND-OFF  [STAND-OFF]  212.09,37.85 0 top
JP274  LOGO-SFESK  [SFE-LOGO-FLAME]  199.26,37.34 0 top
JP275  FIDUCIAL1X2  [FIDUCIAL-1X2]  195.33,30.73 0 top
JP276  FIDUCIAL1X2  [FIDUCIAL-1X2]  209.55,36.58 0 top
JP277  OUTPUT  [1X08]  216.41,25.15 0 top
JP278  STAND-OFF  [STAND-OFF]  217.68,37.85 0 top
JP279  STAND-OFF  [STAND-OFF]  232.92,37.85 0 top
JP280  LOGO-SFESK  [SFE-LOGO-FLAME]  220.09,37.34 0 top
JP281  FIDUCIAL1X2  [FIDUCIAL-1X2]  216.15,30.73 0 top
JP282  FIDUCIAL1X2  [FIDUCIAL-1X2]  230.38,36.58 0 top
JP283  OUTPUT  [1X08]  237.24,25.15 0 top
JP284  STAND-OFF  [STAND-OFF]  238.51,37.85 0 top
JP285  STAND-OFF  [STAND-OFF]  253.75,37.85 0 top
JP286  LOGO-SFESK  [SFE-LOGO-FLAME]  240.92,37.34 0 top
JP287  FIDUCIAL1X2  [FIDUCIAL-1X2]  236.98,30.73 0 top
JP288  FIDUCIAL1X2  [FIDUCIAL-1X2]  251.21,36.58 0 top
JP289  OUTPUT  [1X08]  133.1,42.16 0 top
JP290  STAND-OFF  [STAND-OFF]  134.37,54.86 0 top
JP291  STAND-OFF  [STAND-OFF]  149.61,54.86 0 top
JP292  LOGO-SFESK  [SFE-LOGO-FLAME]  136.78,54.36 0 top
JP293  FIDUCIAL1X2  [FIDUCIAL-1X2]  132.84,47.75 0 top
JP294  FIDUCIAL1X2  [FIDUCIAL-1X2]  147.07,53.59 0 top
JP295  OUTPUT  [1X08]  153.92,42.16 0 top
JP296  STAND-OFF  [STAND-OFF]  155.19,54.86 0 top
JP297  STAND-OFF  [STAND-OFF]  170.43,54.86 0 top
JP298  LOGO-SFESK  [SFE-LOGO-FLAME]  157.61,54.36 0 top
JP299  FIDUCIAL1X2  [FIDUCIAL-1X2]  153.67,47.75 0 top
JP300  FIDUCIAL1X2  [FIDUCIAL-1X2]  167.89,53.59 0 top
JP301  OUTPUT  [1X08]  174.75,42.16 0 top
JP302  STAND-OFF  [STAND-OFF]  176.02,54.86 0 top
JP303  STAND-OFF  [STAND-OFF]  191.26,54.86 0 top
JP304  LOGO-SFESK  [SFE-LOGO-FLAME]  178.44,54.36 0 top
JP305  FIDUCIAL1X2  [FIDUCIAL-1X2]  174.5,47.75 0 top
JP306  FIDUCIAL1X2  [FIDUCIAL-1X2]  188.72,53.59 0 top
JP307  OUTPUT  [1X08]  195.58,42.16 0 top
JP308  STAND-OFF  [STAND-OFF]  196.85,54.86 0 top
JP309  STAND-OFF  [STAND-OFF]  212.09,54.86 0 top
JP310  LOGO-SFESK  [SFE-LOGO-FLAME]  199.26,54.36 0 top
JP311  FIDUCIAL1X2  [FIDUCIAL-1X2]  195.33,47.75 0 top
JP312  FIDUCIAL1X2  [FIDUCIAL-1X2]  209.55,53.59 0 top
JP313  OUTPUT  [1X08]  216.41,42.16 0 top
JP314  STAND-OFF  [STAND-OFF]  217.68,54.86 0 top
JP315  STAND-OFF  [STAND-OFF]  232.92,54.86 0 top
JP316  LOGO-SFESK  [SFE-LOGO-FLAME]  220.09,54.36 0 top
JP317  FIDUCIAL1X2  [FIDUCIAL-1X2]  216.15,47.75 0 top
JP318  FIDUCIAL1X2  [FIDUCIAL-1X2]  230.38,53.59 0 top
JP319  OUTPUT  [1X08]  237.24,42.16 0 top
JP320  STAND-OFF  [STAND-OFF]  238.51,54.86 0 top
JP321  STAND-OFF  [STAND-OFF]  253.75,54.86 0 top
JP322  LOGO-SFESK  [SFE-LOGO-FLAME]  240.92,54.36 0 top
JP323  FIDUCIAL1X2  [FIDUCIAL-1X2]  236.98,47.75 0 top
JP324  FIDUCIAL1X2  [FIDUCIAL-1X2]  251.21,53.59 0 top
JP325  OUTPUT  [1X08]  133.1,59.18 0 top
JP326  STAND-OFF  [STAND-OFF]  134.37,71.88 0 top
JP327  STAND-OFF  [STAND-OFF]  149.61,71.88 0 top
JP328  LOGO-SFESK  [SFE-LOGO-FLAME]  136.78,71.37 0 top
JP329  FIDUCIAL1X2  [FIDUCIAL-1X2]  132.84,64.77 0 top
JP330  FIDUCIAL1X2  [FIDUCIAL-1X2]  147.07,70.61 0 top
JP331  OUTPUT  [1X08]  153.92,59.18 0 top
JP332  STAND-OFF  [STAND-OFF]  155.19,71.88 0 top
JP333  STAND-OFF  [STAND-OFF]  170.43,71.88 0 top
JP334  LOGO-SFESK  [SFE-LOGO-FLAME]  157.61,71.37 0 top
JP335  FIDUCIAL1X2  [FIDUCIAL-1X2]  153.67,64.77 0 top
JP336  FIDUCIAL1X2  [FIDUCIAL-1X2]  167.89,70.61 0 top
JP337  OUTPUT  [1X08]  174.75,59.18 0 top
JP338  STAND-OFF  [STAND-OFF]  176.02,71.88 0 top
JP339  STAND-OFF  [STAND-OFF]  191.26,71.88 0 top
JP340  LOGO-SFESK  [SFE-LOGO-FLAME]  178.44,71.37 0 top
JP341  FIDUCIAL1X2  [FIDUCIAL-1X2]  174.5,64.77 0 top
JP342  FIDUCIAL1X2  [FIDUCIAL-1X2]  188.72,70.61 0 top
JP343  OUTPUT  [1X08]  195.58,59.18 0 top
JP344  STAND-OFF  [STAND-OFF]  196.85,71.88 0 top
JP345  STAND-OFF  [STAND-OFF]  212.09,71.88 0 top
JP346  LOGO-SFESK  [SFE-LOGO-FLAME]  199.26,71.37 0 top
JP347  FIDUCIAL1X2  [FIDUCIAL-1X2]  195.33,64.77 0 top
JP348  FIDUCIAL1X2  [FIDUCIAL-1X2]  209.55,70.61 0 top
JP349  OUTPUT  [1X08]  216.41,59.18 0 top
JP350  STAND-OFF  [STAND-OFF]  217.68,71.88 0 top
JP351  STAND-OFF  [STAND-OFF]  232.92,71.88 0 top
JP352  LOGO-SFESK  [SFE-LOGO-FLAME]  220.09,71.37 0 top
JP353  FIDUCIAL1X2  [FIDUCIAL-1X2]  216.15,64.77 0 top
JP354  FIDUCIAL1X2  [FIDUCIAL-1X2]  230.38,70.61 0 top
JP355  OUTPUT  [1X08]  237.24,59.18 0 top
JP356  STAND-OFF  [STAND-OFF]  238.51,71.88 0 top
JP357  STAND-OFF  [STAND-OFF]  253.75,71.88 0 top
JP358  LOGO-SFESK  [SFE-LOGO-FLAME]  240.92,71.37 0 top
JP359  FIDUCIAL1X2  [FIDUCIAL-1X2]  236.98,64.77 0 top
JP360  FIDUCIAL1X2  [FIDUCIAL-1X2]  251.21,70.61 0 top
JP361  OUTPUT  [1X08]  133.1,76.2 0 top
JP362  STAND-OFF  [STAND-OFF]  134.37,88.9 0 top
JP363  STAND-OFF  [STAND-OFF]  149.61,88.9 0 top
JP364  LOGO-SFESK  [SFE-LOGO-FLAME]  136.78,88.39 0 top
JP365  FIDUCIAL1X2  [FIDUCIAL-1X2]  132.84,81.79 0 top
JP366  FIDUCIAL1X2  [FIDUCIAL-1X2]  147.07,87.63 0 top
JP367  OUTPUT  [1X08]  153.92,76.2 0 top
JP368  STAND-OFF  [STAND-OFF]  155.19,88.9 0 top
JP369  STAND-OFF  [STAND-OFF]  170.43,88.9 0 top
JP370  LOGO-SFESK  [SFE-LOGO-FLAME]  157.61,88.39 0 top
JP371  FIDUCIAL1X2  [FIDUCIAL-1X2]  153.67,81.79 0 top
JP372  FIDUCIAL1X2  [FIDUCIAL-1X2]  167.89,87.63 0 top
JP373  OUTPUT  [1X08]  174.75,76.2 0 top
JP374  STAND-OFF  [STAND-OFF]  176.02,88.9 0 top
JP375  STAND-OFF  [STAND-OFF]  191.26,88.9 0 top
JP376  LOGO-SFESK  [SFE-LOGO-FLAME]  178.44,88.39 0 top
JP377  FIDUCIAL1X2  [FIDUCIAL-1X2]  174.5,81.79 0 top
JP378  FIDUCIAL1X2  [FIDUCIAL-1X2]  188.72,87.63 0 top
JP379  OUTPUT  [1X08]  195.58,76.2 0 top
JP380  STAND-OFF  [STAND-OFF]  196.85,88.9 0 top
JP381  STAND-OFF  [STAND-OFF]  212.09,88.9 0 top
JP382  LOGO-SFESK  [SFE-LOGO-FLAME]  199.26,88.39 0 top
JP383  FIDUCIAL1X2  [FIDUCIAL-1X2]  195.33,81.79 0 top
JP384  FIDUCIAL1X2  [FIDUCIAL-1X2]  209.55,87.63 0 top
JP385  OUTPUT  [1X08]  216.41,76.2 0 top
JP386  STAND-OFF  [STAND-OFF]  217.68,88.9 0 top
JP387  STAND-OFF  [STAND-OFF]  232.92,88.9 0 top
JP388  LOGO-SFESK  [SFE-LOGO-FLAME]  220.09,88.39 0 top
JP389  FIDUCIAL1X2  [FIDUCIAL-1X2]  216.15,81.79 0 top
JP390  FIDUCIAL1X2  [FIDUCIAL-1X2]  230.38,87.63 0 top
JP391  OUTPUT  [1X08]  237.24,76.2 0 top
JP392  STAND-OFF  [STAND-OFF]  238.51,88.9 0 top
JP393  STAND-OFF  [STAND-OFF]  253.75,88.9 0 top
JP394  LOGO-SFESK  [SFE-LOGO-FLAME]  240.92,88.39 0 top
JP395  FIDUCIAL1X2  [FIDUCIAL-1X2]  236.98,81.79 0 top
JP396  FIDUCIAL1X2  [FIDUCIAL-1X2]  251.21,87.63 0 top
JP397  OUTPUT  [1X08]  133.1,93.22 0 top
JP398  STAND-OFF  [STAND-OFF]  134.37,105.92 0 top
JP399  STAND-OFF  [STAND-OFF]  149.61,105.92 0 top
JP400  LOGO-SFESK  [SFE-LOGO-FLAME]  136.78,105.41 0 top
JP401  FIDUCIAL1X2  [FIDUCIAL-1X2]  132.84,98.81 0 top
JP402  FIDUCIAL1X2  [FIDUCIAL-1X2]  147.07,104.65 0 top
JP403  OUTPUT  [1X08]  153.92,93.22 0 top
JP404  STAND-OFF  [STAND-OFF]  155.19,105.92 0 top
JP405  STAND-OFF  [STAND-OFF]  170.43,105.92 0 top
JP406  LOGO-SFESK  [SFE-LOGO-FLAME]  157.61,105.41 0 top
JP407  FIDUCIAL1X2  [FIDUCIAL-1X2]  153.67,98.81 0 top
JP408  FIDUCIAL1X2  [FIDUCIAL-1X2]  167.89,104.65 0 top
JP409  OUTPUT  [1X08]  174.75,93.22 0 top
JP410  STAND-OFF  [STAND-OFF]  176.02,105.92 0 top
JP411  STAND-OFF  [STAND-OFF]  191.26,105.92 0 top
JP412  LOGO-SFESK  [SFE-LOGO-FLAME]  178.44,105.41 0 top
JP413  FIDUCIAL1X2  [FIDUCIAL-1X2]  174.5,98.81 0 top
JP414  FIDUCIAL1X2  [FIDUCIAL-1X2]  188.72,104.65 0 top
JP415  OUTPUT  [1X08]  195.58,93.22 0 top
JP416  STAND-OFF  [STAND-OFF]  196.85,105.92 0 top
JP417  STAND-OFF  [STAND-OFF]  212.09,105.92 0 top
JP418  LOGO-SFESK  [SFE-LOGO-FLAME]  199.26,105.41 0 top
JP419  FIDUCIAL1X2  [FIDUCIAL-1X2]  195.33,98.81 0 top
JP420  FIDUCIAL1X2  [FIDUCIAL-1X2]  209.55,104.65 0 top
JP421  OUTPUT  [1X08]  216.41,93.22 0 top
JP422  STAND-OFF  [STAND-OFF]  217.68,105.92 0 top
JP423  STAND-OFF  [STAND-OFF]  232.92,105.92 0 top
JP424  LOGO-SFESK  [SFE-LOGO-FLAME]  220.09,105.41 0 top
JP425  FIDUCIAL1X2  [FIDUCIAL-1X2]  216.15,98.81 0 top
JP426  FIDUCIAL1X2  [FIDUCIAL-1X2]  230.38,104.65 0 top
JP427  OUTPUT  [1X08]  237.24,93.22 0 top
JP428  STAND-OFF  [STAND-OFF]  238.51,105.92 0 top
JP429  STAND-OFF  [STAND-OFF]  253.75,105.92 0 top
JP430  LOGO-SFESK  [SFE-LOGO-FLAME]  240.92,105.41 0 top
JP431  FIDUCIAL1X2  [FIDUCIAL-1X2]  236.98,98.81 0 top
JP432  FIDUCIAL1X2  [FIDUCIAL-1X2]  251.21,104.65 0 top
R1  10k  [0402-RES]  13.21,19.56 270 top
R2  10k  [0402-RES]  10.67,14.48 270 top
R3  10k  [0402-RES]  9.4,14.48 270 top
R4  10k  [0402-RES]  34.04,19.56 270 top
R5  10k  [0402-RES]  31.5,14.48 270 top
R6  10k  [0402-RES]  30.23,14.48 270 top
R7  10k  [0402-RES]  54.86,19.56 270 top
R8  10k  [0402-RES]  52.32,14.48 270 top
R9  10k  [0402-RES]  51.05,14.48 270 top
R10  10k  [0402-RES]  75.69,19.56 270 top
R11  10k  [0402-RES]  73.15,14.48 270 top
R12  10k  [0402-RES]  71.88,14.48 270 top
R13  10k  [0402-RES]  96.52,19.56 270 top
R14  10k  [0402-RES]  93.98,14.48 270 top
R15  10k  [0402-RES]  92.71,14.48 270 top
R16  10k  [0402-RES]  117.35,19.56 270 top
R17  10k  [0402-RES]  114.81,14.48 270 top
R18  10k  [0402-RES]  113.54,14.48 270 top
R19  10k  [0402-RES]  13.21,36.58 270 top
R20  10k  [0402-RES]  10.67,31.5 270 top
R21  10k  [0402-RES]  9.4,31.5 270 top
R22  10k  [0402-RES]  34.04,36.58 270 top
R23  10k  [0402-RES]  31.5,31.5 270 top
R24  10k  [0402-RES]  30.23,31.5 270 top
R25  10k  [0402-RES]  54.86,36.58 270 top
R26  10k  [0402-RES]  52.32,31.5 270 top
R27  10k  [0402-RES]  51.05,31.5 270 top
R28  10k  [0402-RES]  75.69,36.58 270 top
R29  10k  [0402-RES]  73.15,31.5 270 top
R30  10k  [0402-RES]  71.88,31.5 270 top
R31  10k  [0402-RES]  96.52,36.58 270 top
R32  10k  [0402-RES]  93.98,31.5 270 top
R33  10k  [0402-RES]  92.71,31.5 270 top
R34  10k  [0402-RES]  117.35,36.58 270 top
R35  10k  [0402-RES]  114.81,31.5 270 top
R36  10k  [0402-RES]  113.54,31.5 270 top
R37  10k  [0402-RES]  13.21,53.59 270 top
R38  10k  [0402-RES]  10.67,48.51 270 top
R39  10k  [0402-RES]  9.4,48.51 270 top
R40  10k  [0402-RES]  34.04,53.59 270 top
R41  10k  [0402-RES]  31.5,48.51 270 top
R42  10k  [0402-RES]  30.23,48.51 270 top
R43  10k  [0402-RES]  54.86,53.59 270 top
R44  10k  [0402-RES]  52.32,48.51 270 top
R45  10k  [0402-RES]  51.05,48.51 270 top
R46  10k  [0402-RES]  75.69,53.59 270 top
R47  10k  [0402-RES]  73.15,48.51 270 top
R48  10k  [0402-RES]  71.88,48.51 270 top
R49  10k  [0402-RES]  96.52,53.59 270 top
R50  10k  [0402-RES]  93.98,48.51 270 top
R51  10k  [0402-RES]  92.71,48.51 270 top
R52  10k  [0402-RES]  117.35,53.59 270 top
R53  10k  [0402-RES]  114.81,48.51 270 top
R54  10k  [0402-RES]  113.54,48.51 270 top
R55  10k  [0402-RES]  13.21,70.61 270 top
R56  10k  [0402-RES]  10.67,65.53 270 top
R57  10k  [0402-RES]  9.4,65.53 270 top
R58  10k  [0402-RES]  34.04,70.61 270 top
R59  10k  [0402-RES]  31.5,65.53 270 top
R60  10k  [0402-RES]  30.23,65.53 270 top
R61  10k  [0402-RES]  54.86,70.61 270 top
R62  10k  [0402-RES]  52.32,65.53 270 top
R63  10k  [0402-RES]  51.05,65.53 270 top
R64  10k  [0402-RES]  75.69,70.61 270 top
R65  10k  [0402-RES]  73.15,65.53 270 top
R66  10k  [0402-RES]  71.88,65.53 270 top
R67  10k  [0402-RES]  96.52,70.61 270 top
R68  10k  [0402-RES]  93.98,65.53 270 top
R69  10k  [0402-RES]  92.71,65.53 270 top
R70  10k  [0402-RES]  117.35,70.61 270 top
R71  10k  [0402-RES]  114.81,65.53 270 top
R72  10k  [0402-RES]  113.54,65.53 270 top
R73  10k  [0402-RES]  13.21,87.63 270 top
R74  10k  [0402-RES]  10.67,82.55 270 top
R75  10k  [0402-RES]  9.4,82.55 270 top
R76  10k  [0402-RES]  34.04,87.63 270 top
R77  10k  [0402-RES]  31.5,82.55 270 top
R78  10k  [0402-RES]  30.23,82.55 270 top
R79  10k  [0402-RES]  54.86,87.63 270 top
R80  10k  [0402-RES]  52.32,82.55 270 top
R81  10k  [0402-RES]  51.05,82.55 270 top
R82  10k  [0402-RES]  75.69,87.63 270 top
R83  10k  [0402-RES]  73.15,82.55 270 top
R84  10k  [0402-RES]  71.88,82.55 270 top
R85  10k  [0402-RES]  96.52,87.63 270 top
R86  10k  [0402-RES]  93.98,82.55 270 top
R87  10k  [0402-RES]  92.71,82.55 270 top
R88  10k  [0402-RES]  117.35,87.63 270 top
R89  10k  [0402-RES]  114.81,82.55 270 top
R90  10k  [0402-RES]  113.54,82.55 270 top
R91  10k  [0402-RES]  13.21,104.65 270 top
R92  10k  [0402-RES]  10.67,99.57 270 top
R93  10k  [0402-RES]  9.4,99.57 270 top
R94  10k  [0402-RES]  34.04,104.65 270 top
R95  10k  [0402-RES]  31.5,99.57 270 top
R96  10k  [0402-RES]  30.23,99.57 270 top
R97  10k  [0402-RES]  54.86,104.65 270 top
R98  10k  [0402-RES]  52.32,99.57 270 top
R99  10k  [0402-RES]  51.05,99.57 270 top
R100  10k  [0402-RES]  75.69,104.65 270 top
R101  10k  [0402-RES]  73.15,99.57 270 top
R102  10k  [0402-RES]  71.88,99.57 270 top
R103  10k  [0402-RES]  96.52,104.65 270 top
R104  10k  [0402-RES]  93.98,99.57 270 top
R105  10k  [0402-RES]  92.71,99.57 270 top
R106  10k  [0402-RES]  117.35,104.65 270 top
R107  10k  [0402-RES]  114.81,99.57 270 top
R108  10k  [0402-RES]  113.54,99.57 270 top
R109  10k  [0402-RES]  138.18,19.56 270 top
R110  10k  [0402-RES]  135.64,14.48 270 top
R111  10k  [0402-RES]  134.37,14.48 270 top
R112  10k  [0402-RES]  159,19.56 270 top
R113  10k  [0402-RES]  156.46,14.48 270 top
R114  10k  [0402-RES]  155.19,14.48 270 top
R115  10k  [0402-RES]  179.83,19.56 270 top
R116  10k  [0402-RES]  177.29,14.48 270 top
R117  10k  [0402-RES]  176.02,14.48 270 top
R118  10k  [0402-RES]  200.66,19.56 270 top
R119  10k  [0402-RES]  198.12,14.48 270 top
R120  10k  [0402-RES]  196.85,14.48 270 top
R121  10k  [0402-RES]  221.49,19.56 270 top
R122  10k  [0402-RES]  218.95,14.48 270 top
R123  10k  [0402-RES]  217.68,14.48 270 top
R124  10k  [0402-RES]  242.32,19.56 270 top
R125  10k  [0402-RES]  239.78,14.48 270 top
R126  10k  [0402-RES]  238.51,14.48 270 top
R127  10k  [0402-RES]  138.18,36.58 270 top
R128  10k  [0402-RES]  135.64,31.5 270 top
R129  10k  [0402-RES]  134.37,31.5 270 top
R130  10k  [0402-RES]  159,36.58 270 top
R131  10k  [0402-RES]  156.46,31.5 270 top
R132  10k  [0402-RES]  155.19,31.5 270 top
R133  10k  [0402-RES]  179.83,36.58 270 top
R134  10k  [0402-RES]  177.29,31.5 270 top
R135  10k  [0402-RES]  176.02,31.5 270 top
R136  10k  [0402-RES]  200.66,36.58 270 top
R137  10k  [0402-RES]  198.12,31.5 270 top
R138  10k  [0402-RES]  196.85,31.5 270 top
R139  10k  [0402-RES]  221.49,36.58 270 top
R140  10k  [0402-RES]  218.95,31.5 270 top
R141  10k  [0402-RES]  217.68,31.5 270 top
R142  10k  [0402-RES]  242.32,36.58 270 top
R143  10k  [0402-RES]  239.78,31.5 270 top
R144  10k  [0402-RES]  238.51,31.5 270 top
R145  10k  [0402-RES]  138.18,53.59 270 top
R146  10k  [0402-RES]  135.64,48.51 270 top
R147  10k  [0402-RES]  134.37,48.51 270 top
R148  10k  [0402-RES]  159,53.59 270 top
R149  10k  [0402-RES]  156.46,48.51 270 top
R150  10k  [0402-RES]  155.19,48.51 270 top
R151  10k  [0402-RES]  179.83,53.59 270 top
R152  10k  [0402-RES]  177.29,48.51 270 top
R153  10k  [0402-RES]  176.02,48.51 270 top
R154  10k  [0402-RES]  200.66,53.59 270 top
R155  10k  [0402-RES]  198.12,48.51 270 top
R156  10k  [0402-RES]  196.85,48.51 270 top
R157  10k  [0402-RES]  221.49,53.59 270 top
R158  10k  [0402-RES]  218.95,48.51 270 top
R159  10k  [0402-RES]  217.68,48.51 270 top
R160  10k  [0402-RES]  242.32,53.59 270 top
R161  10k  [0402-RES]  239.78,48.51 270 top
R162  10k  [0402-RES]  238.51,48.51 270 top
R163  10k  [0402-RES]  138.18,70.61 270 top
R164  10k  [0402-RES]  135.64,65.53 270 top
R165  10k  [0402-RES]  134.37,65.53 270 top
R166  10k  [0402-RES]  159,70.61 270 top
R167  10k  [0402-RES]  156.46,65.53 270 top
R168  10k  [0402-RES]  155.19,65.53 270 top
R169  10k  [0402-RES]  179.83,70.61 270 top
R170  10k  [0402-RES]  177.29,65.53 270 top
R171  10k  [0402-RES]  176.02,65.53 270 top
R172  10k  [0402-RES]  200.66,70.61 270 top
R173  10k  [0402-RES]  198.12,65.53 270 top
R174  10k  [0402-RES]  196.85,65.53 270 top
R175  10k  [0402-RES]  221.49,70.61 270 top
R176  10k  [0402-RES]  218.95,65.53 270 top
R177  10k  [0402-RES]  217.68,65.53 270 top
R178  10k  [0402-RES]  242.32,70.61 270 top
R179  10k  [0402-RES]  239.78,65.53 270 top
R180  10k  [0402-RES]  238.51,65.53 270 top
R181  10k  [0402-RES]  138.18,87.63 270 top
R182  10k  [0402-RES]  135.64,82.55 270 top
R183  10k  [0402-RES]  134.37,82.55 270 top
R184  10k  [0402-RES]  159,87.63 270 top
R185  10k  [0402-RES]  156.46,82.55 270 top
R186  10k  [0402-RES]  155.19,82.55 270 top
R187  10k  [0402-RES]  179.83,87.63 270 top
R188  10k  [0402-RES]  177.29,82.55 270 top
R189  10k  [0402-RES]  176.02,82.55 270 top
R190  10k  [0402-RES]  200.66,87.63 270 top
R191  10k  [0402-RES]  198.12,82.55 270 top
R192  10k  [0402-RES]  196.85,82.55 270 top
R193  10k  [0402-RES]  221.49,87.63 270 top
R194  10k  [0402-RES]  218.95,82.55 270 top
R195  10k  [0402-RES]  217.68,82.55 270 top
R196  10k  [0402-RES]  242.32,87.63 270 top
R197  10k  [0402-RES]  239.78,82.55 270 top
R198  10k  [0402-RES]  238.51,82.55 270 top
R199  10k  [0402-RES]  138.18,104.65 270 top
R200  10k  [0402-RES]  135.64,99.57 270 top
R201  10k  [0402-RES]  134.37,99.57 270 top
R202  10k  [0402-RES]  159,104.65 270 top
R203  10k  [0402-RES]  156.46,99.57 270 top
R204  10k  [0402-RES]  155.19,99.57 270 top
R205  10k  [0402-RES]  179.83,104.65 270 top
R206  10k  [0402-RES]  177.29,99.57 270 top
R207  10k  [0402-RES]  176.02,99.57 270 top
R208  10k  [0402-RES]  200.66,104.65 270 top
R209  10k  [0402-RES]  198.12,99.57 270 top
R210  10k  [0402-RES]  196.85,99.57 270 top
R211  10k  [0402-RES]  221.49,104.65 270 top
R212  10k  [0402-RES]  218.95,99.57 270 top
R213  10k  [0402-RES]  217.68,99.57 270 top
R214  10k  [0402-RES]  242.32,104.65 270 top
R215  10k  [0402-RES]  239.78,99.57 270 top
R216  10k  [0402-RES]  238.51,99.57 270 top
SJ1  I2C-Add  [SJ_3]  13.21,15.75 0 bottom
SJ2  I2C-Mode  [SJ_2S-NO]  20.83,15.75 0 bottom
SJ3  I2C-Add  [SJ_3]  34.04,15.75 0 bottom
SJ4  I2C-Mode  [SJ_2S-NO]  41.66,15.75 0 bottom
SJ5  I2C-Add  [SJ_3]  54.86,15.75 0 bottom
SJ6  I2C-Mode  [SJ_2S-NO]  62.48,15.75 0 bottom
SJ7  I2C-Add  [SJ_3]  75.69,15.75 0 bottom
SJ8  I2C-Mode  [SJ_2S-NO]  83.31,15.75 0 bottom
SJ9  I2C-Add  [SJ_3]  96.52,15.75 0 bottom
SJ10  I2C-Mode  [SJ_2S-NO]  104.14,15.75 0 bottom
SJ11  I2C-Add  [SJ_3]  117.35,15.75 0 bottom
SJ12  I2C-Mode  [SJ_2S-NO]  124.97,15.75 0 bottom
SJ13  I2C-Add  [SJ_3]  13.21,32.77 0 bottom
SJ14  I2C-Mode  [SJ_2S-NO]  20.83,32.77 0 bottom
SJ15  I2C-Add  [SJ_3]  34.04,32.77 0 bottom
SJ16  I2C-Mode  [SJ_2S-NO]  41.66,32.77 0 bottom
SJ17  I2C-Add  [SJ_3]  54.86,32.77 0 bottom
SJ18  I2C-Mode  [SJ_2S-NO]  62.48,32.77 0 bottom
SJ19  I2C-Add  [SJ_3]  75.69,32.77 0 bottom
SJ20  I2C-Mode  [SJ_2S-NO]  83.31,32.77 0 bottom
SJ21  I2C-Add  [SJ_3]  96.52,32.77 0 bottom
SJ22  I2C-Mode  [SJ_2S-NO]  104.14,32.77 0 bottom
SJ23  I2C-Add  [SJ_3]  117.35,32.77 0 bottom
SJ24  I2C-Mode  [SJ_2S-NO]  124.97,32.77 0 bottom
SJ25  I2C-Add  [SJ_3]  13.21,49.78 0 bottom
SJ26  I2C-Mode  [SJ_2S-NO]  20.83,49.78 0 bottom
SJ27  I2C-Add  [SJ_3]  34.04,49.78 0 bottom
SJ28  I2C-Mode  [SJ_2S-NO]  41.66,49.78 0 bottom
SJ29  I2C-Add  [SJ_3]  54.86,49.78 0 bottom
SJ30  I2C-Mode  [SJ_2S-NO]  62.48,49.78 0 bottom
SJ31  I2C-Add  [SJ_3]  75.69,49.78 0 bottom
SJ32  I2C-Mode  [SJ_2S-NO]  83.31,49.78 0 bottom
SJ33  I2C-Add  [SJ_3]  96.52,49.78 0 bottom
SJ34  I2C-Mode  [SJ_2S-NO]  104.14,49.78 0 bottom
SJ35  I2C-Add  [SJ_3]  117.35,49.78 0 bottom
SJ36  I2C-Mode  [SJ_2S-NO]  124.97,49.78 0 bottom
SJ37  I2C-Add  [SJ_3]  13.21,66.8 0 bottom
SJ38  I2C-Mode  [SJ_2S-NO]  20.83,66.8 0 bottom
SJ39  I2C-Add  [SJ_3]  34.04,66.8 0 bottom
SJ40  I2C-Mode  [SJ_2S-NO]  41.66,66.8 0 bottom
SJ41  I2C-Add  [SJ_3]  54.86,66.8 0 bottom
SJ42  I2C-Mode  [SJ_2S-NO]  62.48,66.8 0 bottom
SJ43  I2C-Add  [SJ_3]  75.69,66.8 0 bottom
SJ44  I2C-Mode  [SJ_2S-NO]  83.31,66.8 0 bottom
SJ45  I2C-Add  [SJ_3]  96.52,66.8 0 bottom
SJ46  I2C-Mode  [SJ_2S-NO]  104.14,66.8 0 bottom
SJ47  I2C-Add  [SJ_3]  117.35,66.8 0 bottom
SJ48  I2C-Mode  [SJ_2S-NO]  124.97,66.8 0 bottom
SJ49  I2C-Add  [SJ_3]  13.21,83.82 0 bottom
SJ50  I2C-Mode  [SJ_2S-NO]  20.83,83.82 0 bottom
SJ51  I2C-Add  [SJ_3]  34.04,83.82 0 bottom
SJ52  I2C-Mode  [SJ_2S-NO]  41.66,83.82 0 bottom
SJ53  I2C-Add  [SJ_3]  54.86,83.82 0 bottom
SJ54  I2C-Mode  [SJ_2S-NO]  62.48,83.82 0 bottom
SJ55  I2C-Add  [SJ_3]  75.69,83.82 0 bottom
SJ56  I2C-Mode  [SJ_2S-NO]  83.31,83.82 0 bottom
SJ57  I2C-Add  [SJ_3]  96.52,83.82 0 bottom
SJ58  I2C-Mode  [SJ_2S-NO]  104.14,83.82 0 bottom
SJ59  I2C-Add  [SJ_3]  117.35,83.82 0 bottom
SJ60  I2C-Mode  [SJ_2S-NO]  124.97,83.82 0 bottom
SJ61  I2C-Add  [SJ_3]  13.21,100.84 0 bottom
SJ62  I2C-Mode  [SJ_2S-NO]  20.83,100.84 0 bottom
SJ63  I2C-Add  [SJ_3]  34.04,100.84 0 bottom
SJ64  I2C-Mode  [SJ_2S-NO]  41.66,100.84 0 bottom
SJ65  I2C-Add  [SJ_3]  54.86,100.84 0 bottom
SJ66  I2C-Mode  [SJ_2S-NO]  62.48,100.84 0 bottom
SJ67  I2C-Add  [SJ_3]  75.69,100.84 0 bottom
SJ68  I2C-Mode  [SJ_2S-NO]  83.31,100.84 0 bottom
SJ69  I2C-Add  [SJ_3]  96.52,100.84 0 bottom
SJ70  I2C-Mode  [SJ_2S-NO]  104.14,100.84 0 bottom
SJ71  I2C-Add  [SJ_3]  117.35,100.84 0 bottom
SJ72  I2C-Mode  [SJ_2S-NO]  124.97,100.84 0 bottom
SJ73  I2C-Add  [SJ_3]  138.18,15.75 0 bottom
SJ74  I2C-Mode  [SJ_2S-NO]  145.8,15.75 0 bottom
SJ75  I2C-Add  [SJ_3]  159,15.75 0 bottom
SJ76  I2C-Mode  [SJ_2S-NO]  166.62,15.75 0 bottom
SJ77  I2C-Add  [SJ_3]  179.83,15.75 0 bottom
SJ78  I2C-Mode  [SJ_2S-NO]  187.45,15.75 0 bottom
SJ79  I2C-Add  [SJ_3]  200.66,15.75 0 bottom
SJ80  I2C-Mode  [SJ_2S-NO]  208.28,15.75 0 bottom
SJ81  I2C-Add  [SJ_3]  221.49,15.75 0 bottom
SJ82  I2C-Mode  [SJ_2S-NO]  229.11,15.75 0 bottom
SJ83  I2C-Add  [SJ_3]  242.32,15.75 0 bottom
SJ84  I2C-Mode  [SJ_2S-NO]  249.94,15.75 0 bottom
SJ85  I2C-Add  [SJ_3]  138.18,32.77 0 bottom
SJ86  I2C-Mode  [SJ_2S-NO]  145.8,32.77 0 bottom
SJ87  I2C-Add  [SJ_3]  159,32.77 0 bottom
SJ88  I2C-Mode  [SJ_2S-NO]  166.62,32.77 0 bottom
SJ89  I2C-Add  [SJ_3]  179.83,32.77 0 bottom
SJ90  I2C-Mode  [SJ_2S-NO]  187.45,32.77 0 bottom
SJ91  I2C-Add  [SJ_3]  200.66,32.77 0 bottom
SJ92  I2C-Mode  [SJ_2S-NO]  208.28,32.77 0 bottom
SJ93  I2C-Add  [SJ_3]  221.49,32.77 0 bottom
SJ94  I2C-Mode  [SJ_2S-NO]  229.11,32.77 0 bottom
SJ95  I2C-Add  [SJ_3]  242.32,32.77 0 bottom
SJ96  I2C-Mode  [SJ_2S-NO]  249.94,32.77 0 bottom
SJ97  I2C-Add  [SJ_3]  138.18,49.78 0 bottom
SJ98  I2C-Mode  [SJ_2S-NO]  145.8,49.78 0 bottom